# EAGLE board touch (EAGLE 6.1)
DATE: 11/13; PART#: PC-02; PROJECT: CLOCK; REV: A
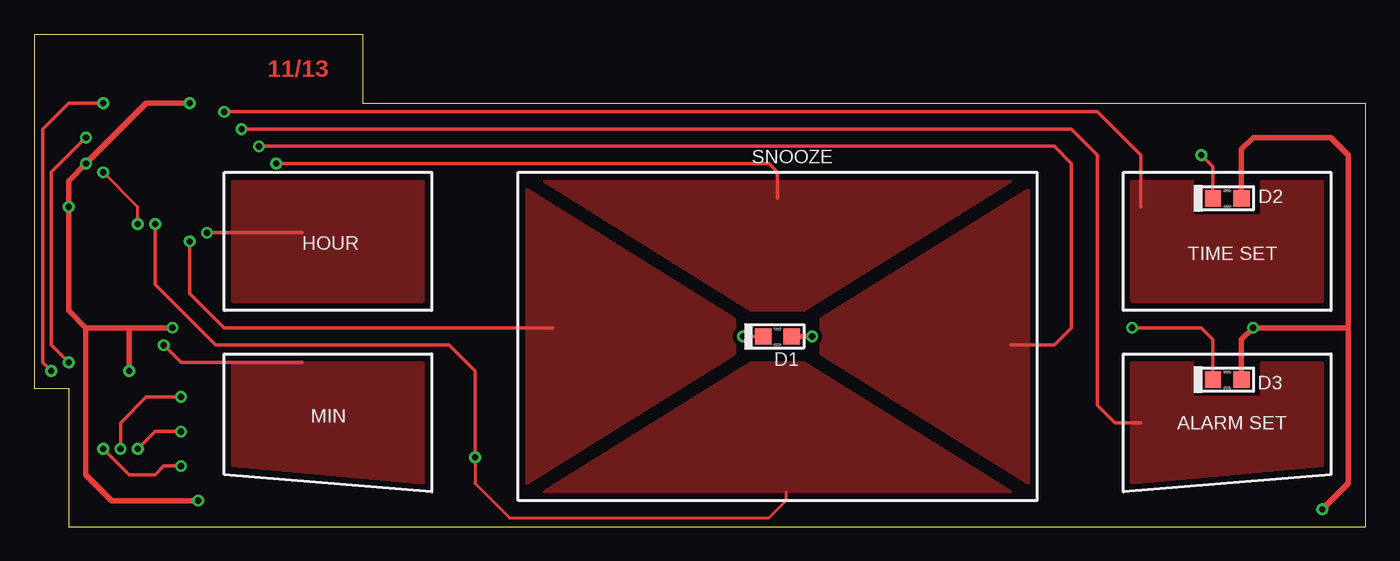
[diagram p0: board, top side]
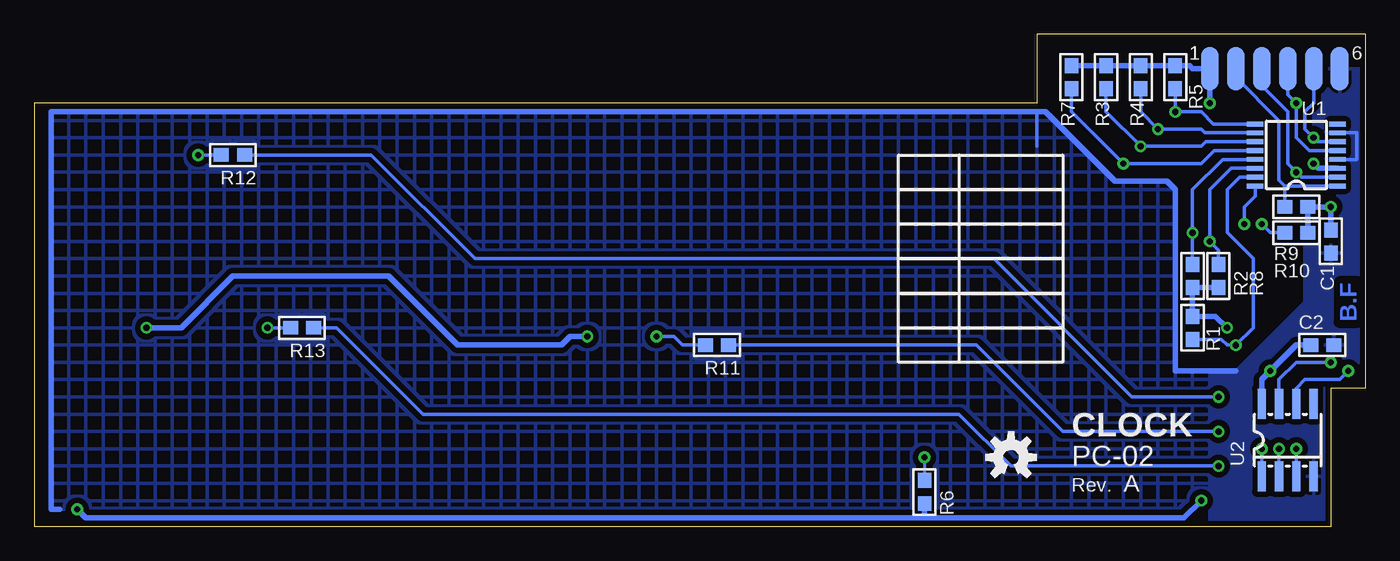
[diagram p1: board, bottom side, seen from below]

Size 97.79 x 36.2 mm. Coordinates in mm from the lower left corner, seen from the top.
Outline: 0,36.2 0,10.16 2.54,10.16 2.54,0 97.79,0 97.79,31.12 24.13,31.12 24.13,36.2 0,36.2
Copper layers (1*16): Top 0.035mm / dielectric 1.5mm / Bottom 0.035mm
Design rules: minimum track width 8mil, minimum drill 18mil, track to track 8mil, track to pad 8mil, pad to pad 8mil, via to via 8mil, smd to smd 8mil, copper to edge 16mil, drill to drill 8mil, minimum pad ring 10mil, minimum via ring 8mil, stop-mask expansion 4mil, vias tented up to drill 24mil, thermal gap 10mil

## Footprints (pad centres in the part's own frame; a part is rotated, then mirrored left to right if it is on the bottom)
WIRE_SMT = smd 3.175 x 1.27: 1 0,0
SMD_0603 = smd 1.1 x 1: 1 -0.85,0; 2 0.85,0
CHIPLED_0805 = smd 1.2 x 1.2: A 0,-1.05; K 0,1.05
TSSOP16 = smd 0.35 x 1.2: 1 -2.275,-3.025; 2 -1.625,-3.025; 3 -0.975,-3.025; 4 -0.325,-3.025; 5 0.325,-3.025; 6 0.975,-3.025; 7 1.625,-3.025; 8 2.275,-3.025; 9 2.275,3.025; 10 1.625,3.025; 11 0.975,3.025; 12 0.325,3.025; 13 -0.325,3.025; 14 -0.975,3.025; 15 -1.625,3.025; 16 -2.275,3.025
SOIC8 = smd 0.6 x 2.2: 1 -1.905,-2.667; 2 -0.635,-2.667; 3 0.635,-2.667; 4 1.905,-2.667; 5 1.905,2.667; 6 0.635,2.667; 7 -0.635,2.667; 8 -1.905,2.667

## Placement (x,y rotation side)
3.3V  1  [WIRE_SMT]  11.43,33.66 270 bottom
!ATTN  2  [WIRE_SMT]  9.52,33.66 270 bottom
!IRQ  3  [WIRE_SMT]  7.62,33.66 270 bottom
C1  1uF  [SMD_0603]  2.54,20.95 90 bottom
C2  100nF  [SMD_0603]  3.17,13.34 0 bottom
D1  {ATTR:COLOR}  [CHIPLED_0805]  54.61,13.97 90 top
D2  {ATTR:COLOR}  [CHIPLED_0805]  87.63,24.13 90 top
D3  {ATTR:COLOR}  [CHIPLED_0805]  87.63,10.79 90 top
R1  780k  [SMD_0603]  12.7,14.61 90 bottom
R2  780k  [SMD_0603]  12.7,18.41 270 bottom
R3  780k  [SMD_0603]  19.05,33.02 90 bottom
R4  780k  [SMD_0603]  16.51,33.02 90 bottom
R5  780k  [SMD_0603]  13.97,33.02 90 bottom
R6  780k  [SMD_0603]  32.38,2.54 270 bottom
R7  780k  [SMD_0603]  21.59,33.02 90 bottom
R8  780k  [SMD_0603]  10.8,18.41 270 bottom
R9  4.7k  [SMD_0603]  5.08,23.5 0 bottom
R10  4.7k  [SMD_0603]  5.08,21.59 0 bottom
R11  56  [SMD_0603]  47.62,13.34 180 bottom
R12  56  [SMD_0603]  83.19,27.3 180 bottom
R13  56  [SMD_0603]  78.11,14.61 180 bottom
SCL  4  [WIRE_SMT]  5.71,33.66 270 bottom
SDA  5  [WIRE_SMT]  3.81,33.66 90 bottom
U1  MPR084EJ  [TSSOP16]  5.08,27.3 90 bottom
U2  PCA9533D/01  [SOIC8]  5.71,6.35 0 bottom
U$1  [INFO_AUTHOR]  1.27,16.51 90 bottom
U$2  [INFO_DATE]  17.14,33.02 0 top
U$3  [INFO_COMPACT]  16.51,5.08 0 bottom
U$5  [OPENHW_LOGO_150]  26.04,5.08 0 bottom
U$11  [LEGEND_ROW_30]  29.84,26.04 0 bottom
U$12  [LEGEND_ROW_30]  29.84,23.5 0 bottom
U$13  [LEGEND_ROW_30]  29.84,20.95 0 bottom
U$14  [LEGEND_ROW_30]  29.84,18.41 0 bottom
U$15  [LEGEND_ROW_30]  29.84,15.88 0 bottom
U$16  [LEGEND_ROW_30]  29.84,13.34 0 bottom
W6  6  [WIRE_SMT]  1.91,33.66 90 bottom

## Library data of the parts
3.3V !ATTN !IRQ SCL SDA W6 = Misc; BOM: FALSE
C1 C2 = Passive; DESCRIPTION: {DESCRIPTION} - SMT 0603 - {value}; PACKAGE: SMT 0603
D1-D3 = Optoelectronic; COLOR: Green; DESCRIPTION: {DESCRIPTION} Chip 0805 - {ATTR:COLOR}; PACKAGE: SMT 0805; SKU: -
R1-R13 = Passive; DESCRIPTION: {DESCRIPTION} - SMT 0603 - {VALUE}; PACKAGE: SMT 0603
U1 = IC
U2 = IC; ADDR: 0xC4; MFG: NXP Semiconductors
U$1-U$3 U$5 = Symbols
U$11 = Symbols; PIN: 1; VAL: 3.3V
U$12 = Symbols; PIN: 2; VAL: ATTN
U$13 = Symbols; PIN: 3; VAL: IRQ
U$14 = Symbols; PIN: 4; VAL: SCL
U$15 = Symbols; PIN: 5; VAL: SDA
U$16 = Symbols; PIN: 6; VAL: GND

## Nets
3.3V: 3.3V.1 C1.2 C2.1 D1.A D2.A D3.A R1.2 R2.2 R3.2 R4.2 R5.2 R6.2 R7.2 R8.2 R9.2 R10.2 U1.3 U2.8
!ATTN: !ATTN.1 R9.1 U1.1
!IRQ: !IRQ.1 R10.1 U1.2
E_ALARM: R4.1 U1.10
E_DOWN: R6.1 U1.16
E_HOUR: R2.1 U1.13
E_LEFT: R8.1 U1.14
E_MIN: R1.1 U1.15
E_RIGHT: R3.1 U1.11
E_TIME: R5.1 U1.9
E_UP: R7.1 U1.12
GND: C1.1 C2.2 U1.4 U1.7 U2.4 W6.1
N$1: D1.K R11.2
N$2: D2.K R12.2
N$3: D3.K R13.2
N$4: R11.1 U2.1
N$5: R12.1 U2.2
N$6: R13.1 U2.3
SCL: SCL.1 U1.5 U2.6
SDA: SDA.1 U1.6 U2.7

## Tracks (layer width: path | path; a pad name or v marks a point on that pad's centre or on a via)
3.3V  (via drill 0.46)
  Top 0.406: v11.43,31.12 8.26,31.12 v3.81,26.67 2.54,25.4 v2.54,23.5 2.54,15.88 3.81,14.61 | v10.16,14.61 6.98,14.61 | 6.98,14.61 3.81,14.61 | D3.A 88.68,13.75 v89.53,14.61 96.52,14.61 | D2.A 88.68,27.72 89.53,28.57 95.25,28.57 96.52,27.3 96.52,14.61 | 96.52,14.61 96.52,3.18 v94.62,1.27 | D1.A v57.15,13.97 | v12.06,1.91 5.71,1.91 3.81,3.81 3.81,14.61 | v6.98,11.43 6.98,14.61
  Bottom 0.406: U1.3 3.47,26.33 v3.81,26.67 | v11.43,31.12 3.3V.1 12.7,33.66 12.91,33.87 R5.2 R4.2 R3.2 R7.2 | C1.2 v2.54,23.5 R9.2 R10.2 | R8.2 R2.2 R1.2 11.01,15.46 v10.16,14.61 | v94.62,1.27 93.98,0.64 32.38,0.64 | 32.38,0.64 13.34,0.64 v12.06,1.91 | v57.15,13.97 58.42,13.97 59.05,13.34 66.67,13.34 71.75,18.41 83.19,18.41 87,14.61 v89.53,14.61 | R6.2 32.38,0.64 | U2.8 7.62,10.79 v6.98,11.43 5.08,13.34 C2.1
!ATTN
  Bottom 0.203: 9.52,33.02 !ATTN.1
  Bottom 0.254: U1.1 5.93,25.03 | 9.52,33.02 6.35,29.84 6.35,25.45 5.93,25.03 | R9.1 5.93,25.03
!IRQ  (via drill 0.46)
  Top 0.203: v7.62,22.23 7.62,23.5 v5.08,26.04
  Bottom 0.203: !IRQ.1 7.62,32.38
  Bottom 0.254: U1.2 4.73,25.68 v5.08,26.04 5.71,26.67 5.71,30.48 7.62,32.38 | R10.1 6.98,21.59 v7.62,22.23
E_ALARM  (via drill 0.46)
  Top 0.254: 81.28,7.62 79.38,7.62 78.11,8.89 78.11,27.3 76.2,29.21 v15.24,29.21
  Bottom 0.254: U1.10 11.78,28.93 12.06,29.21 v15.24,29.21 16.51,30.48 R4.1
  pour Top: 90.17,12.06 94.62,12.06 94.62,4.45 80.64,3.18 80.64,12.06 85.09,12.06 85.09,9.52 90.17,9.52
E_DOWN  (via drill 0.46)
  Top 0.203: 55.24,2.54 55.24,1.91 53.98,0.64 34.92,0.64 32.38,3.18 v32.38,5.08
  Top 0.254: v8.89,22.23 8.89,17.78 13.34,13.34 30.48,13.34 32.38,11.43 v32.38,5.08
  Bottom 0.203: v32.38,5.08 R6.1
  Bottom 0.254: U1.16 8.1,24.28 8.89,23.5 v8.89,22.23
  pour Top: 37.47,2.54 52.7,12.06 56.52,12.06 71.75,2.54
E_HOUR  (via drill 0.46)
  Top 0.254: v12.7,21.59 19.69,21.59
  Bottom 0.254: R2.1 v12.7,21.59 12.7,24.77 10.48,26.98 U1.13
  pour Top: 14.6,16.51 14.6,25.4 28.57,25.4 28.57,16.51
E_LEFT  (via drill 0.46)
  Top 0.254: 38.1,14.61 13.97,14.61 11.43,17.14 v11.43,20.95
  Bottom 0.254: U1.14 9.87,26.33 11.43,24.77 v11.43,20.95 10.8,20.32 R8.1
  pour Top (isolate 0.305): 36.2,3.18 36.2,24.77 51.44,15.24 51.44,12.7
E_MIN  (via drill 0.46)
  Top 0.254: v9.52,13.34 10.8,12.06 19.69,12.06
  Bottom 0.254: U1.15 9.24,25.68 10.16,24.77 10.16,21.59 8.26,19.69 8.26,14.61 v9.52,13.34 10.16,13.34 10.58,13.76 R1.1
  pour Top: 14.6,12.06 28.57,12.06 28.57,3.18 14.6,4.45
E_RIGHT  (via drill 0.46)
  Top 0.254: v16.51,27.94 74.93,27.94 76.2,26.67 76.2,14.61 74.93,13.34 71.75,13.34
  Bottom 0.254: U1.11 11.73,28.28 12.06,27.94 v16.51,27.94 19.05,30.48 R3.1
  pour Top (isolate 0.305): 73.03,3.18 57.78,12.7 57.78,15.24 73.03,24.77
E_TIME  (via drill 0.46)
  Top 0.254: 81.28,23.5 81.28,27.3 78.11,30.48 v13.97,30.48
  Bottom 0.254: U1.9 11.16,29.58 12.06,30.48 v13.97,30.48 R5.1
  pour Top: 80.64,16.51 80.64,25.4 85.09,25.4 85.09,22.86 90.17,22.86 90.17,25.4 94.62,25.4 94.62,16.51
E_UP  (via drill 0.46)
  Top 0.254: 54.61,24.13 54.61,26.04 53.98,26.67 v17.78,26.67
  Bottom 0.254: U1.12 11.1,27.63 12.06,26.67 v17.78,26.67 21.59,30.48 R7.1
  pour Top: 37.47,25.4 71.75,25.4 56.52,15.88 52.7,15.88
GND
  Bottom 0.254: 24.13,27.94 24.13,30.48 | U1.4 0.63,26.98 0.63,28.93 U1.7
  Bottom 0.406: 9.52,11.43 13.97,11.43 13.97,24.77 14.6,25.4 18.41,25.4 23.5,30.48 96.52,30.48 96.52,1.27 95.88,1.27
  pour Bottom (isolate 0.406, rank 3): 0,33.66 6.35,33.66 6.35,26.67 4.45,24.77 4.45,16.51 9.52,11.43 11.43,11.43 11.43,0 0,0
  pour Bottom (isolate 0.406, rank 3, hatched): 96.52,1.27 96.52,30.48 23.5,30.48 18.41,25.4 14.6,25.4 13.97,24.77 13.97,11.43 11.43,11.43 11.43,1.27
N$1  (via drill 0.46)
  Top 0.254: D1.K v52.07,13.97
  Bottom 0.254: v52.07,13.97 50.8,13.97 50.16,13.34 R11.2
N$2  (via drill 0.46)
  Top 0.254: D2.K 86.58,26.45 v85.72,27.3
  Bottom 0.254: R12.2 v85.72,27.3
N$3  (via drill 0.46)
  Top 0.254: D3.K 86.58,13.75 85.72,14.61 v80.64,14.61
  Bottom 0.254: R13.2 v80.64,14.61
N$4  (via drill 0.46)
  Top 0.254: v7.62,5.71 8.89,6.98 v10.8,6.98
  Bottom 0.254: R11.1 28.57,13.34 22.23,6.98 v10.8,6.98 | U2.1 v7.62,5.71
N$5  (via drill 0.46)
  Top 0.254: v6.35,5.71 6.35,7.62 8.26,9.52 v10.8,9.52
  Bottom 0.254: R12.1 73.03,27.3 65.41,19.69 27.3,19.69 17.14,9.52 v10.8,9.52 | U2.2 v6.35,5.71
N$6  (via drill 0.46)
  Top 0.254: v10.8,4.45 9.52,4.45 8.89,3.81 6.98,3.81 v5.08,5.71
  Bottom 0.254: R13.1 75.56,14.61 69.22,8.25 29.84,8.25 26.04,4.45 v10.8,4.45 | v5.08,5.71 U2.3
SCL  (via drill 0.46)
  Top 0.254: v1.27,11.43 0.63,12.06 0.63,29.21 2.54,31.12 v5.08,31.12
  Bottom 0.254: U1.5 4.13,27.63 5.08,28.57 v5.08,31.12 5.71,31.75 SCL.1 | U2.6 5.08,10.16 4.45,10.79 1.91,10.79 v1.27,11.43
SDA  (via drill 0.46)
  Top 0.254: v2.54,12.06 1.27,13.34 1.27,26.04 v3.81,28.57
  Bottom 0.254: U1.6 3.52,28.28 v3.81,28.57 4.45,29.21 4.45,30.48 3.81,31.12 SDA.1 | U2.7 6.35,10.79 5.08,12.06 v2.54,12.06

## Text on the board
tPlace: SNOOZE | HOUR | TIME SET | MIN | ALARM SET
bPlace: 6 | 1
_tsilk: SNOOZE | D2 | HOUR | TIME SET | D1 | D3 | MIN | ALARM SET
_bsilk: 6 | 1 | R5 | U1 | R4 | R3 | R7 | 3.3V | 1 | R12 | ATTN | 2 | R9 | IRQ | 3 | C1 | R8 | R2 | R10 | SCL | 4 | C2 | R1 | SDA | 5 | GND | 6 | R13 | R11 | CLOCK | U2 | PC-02 | A | Rev. | R6